# EAGLE board ODS_schematic_v41 (EAGLE 9.7.0)
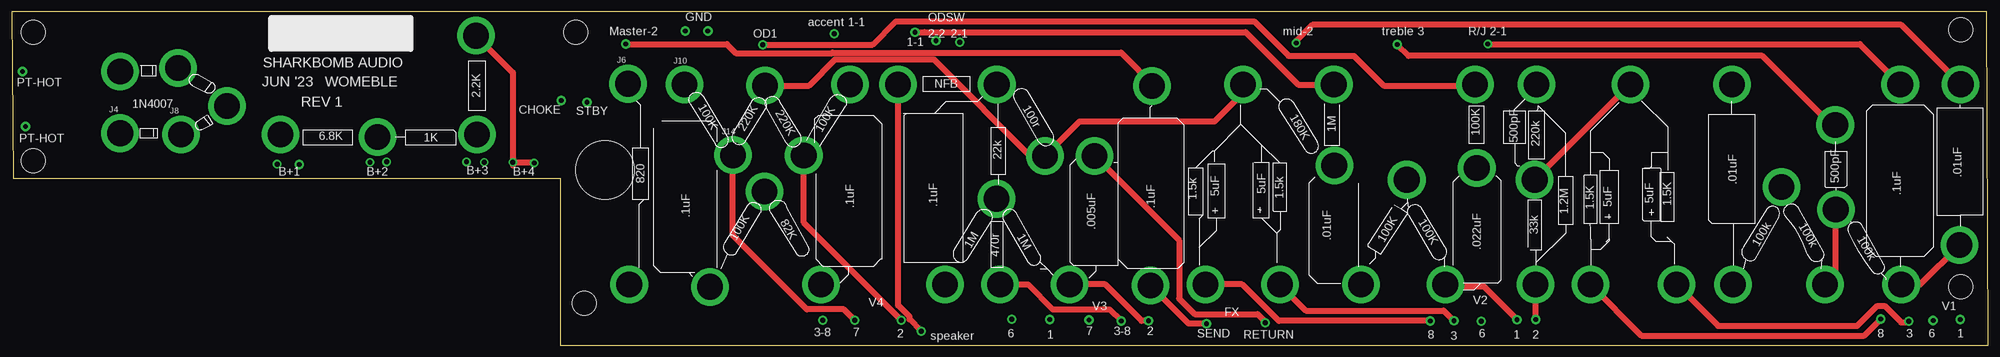
[diagram p0: board, top side]
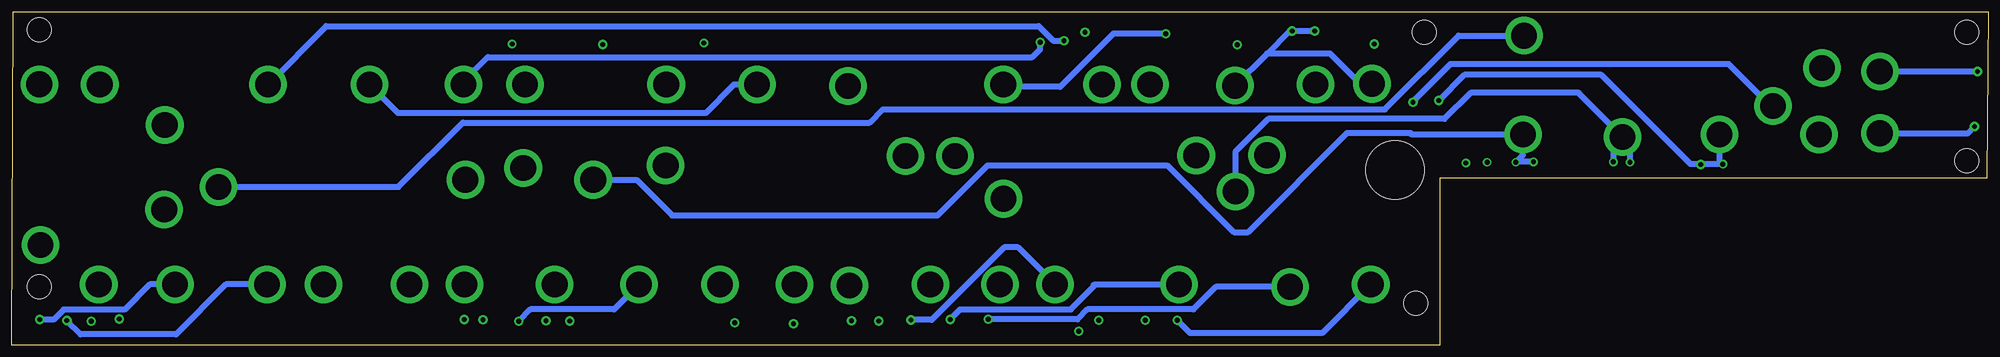
[diagram p1: board, bottom side, seen from below]

Size 415.25 x 70 mm. Coordinates in mm from the lower left corner, seen from the top.
Outline: 0,70 0.25,35 115.25,35 115.25,0 415.25,0 415,70 0,70
Copper layers (1*16): Top / Bottom
Stack-up Default Layer Stack: Top User Defined 0.035mm / Dielectric-1 User Defined 1.5mm / Bottom User Defined 0.035mm
Design rules "default": minimum track width 6mil, minimum drill 0.35mm, track to track 6mil, track to pad 6mil, pad to pad 6mil, via to via 6mil, smd to smd 6mil, copper to edge 40mil, drill to drill 6mil, minimum pad ring 10mil, minimum via ring 8mil, stop-mask expansion 4mil, vias tented up to drill 0mil, thermal gap 10mil
Holes 12.28 mm at 124.64,36.78
Holes 5.08 mm at 4.5,65.75 4.5,38.75 409.5,66.25 409.5,12.25 120.25,8.75 118.5,65.75

## Footprints (pad centres in the part's own frame; a part is rotated, then mirrored left to right if it is on the bottom)
KEYSTONE_575-4 = drill 5.4 pad 7.9: 1 0,0
UNLABELED = drill 1 pad 1.778: P$1 0,0
PAD2 = drill 1.016 pad 1.93: P$1 0,0

## Placement (x,y rotation side)
J1  575-4  [KEYSTONE_575-4]  97.74,44.23 0 top
J2  575-4  [KEYSTONE_575-4]  76.85,43.73 0 top
J3  575-4  [KEYSTONE_575-4]  56.46,44.23 0 top
J4  575-4  [KEYSTONE_575-4]  22.75,44.5 0 top
J5  575-4  [KEYSTONE_575-4]  45.18,50.23 0 top
J6  575-4  [KEYSTONE_575-4]  129.45,54.9 0 top
J7  575-4  [KEYSTONE_575-4]  34.9,58.23 0 top
J8  575-4  [KEYSTONE_575-4]  35.51,44.23 0 top
J9  575-4  [KEYSTONE_575-4]  129.73,12.73 0 top
J10  575-4  [KEYSTONE_575-4]  141.34,54.73 0 top
J11  575-4  [KEYSTONE_575-4]  146.7,12.23 0 top
J12  575-4  [KEYSTONE_575-4]  158.25,54.5 0 top
J13  575-4  [KEYSTONE_575-4]  158.17,32.23 0 top
J14  575-4  [KEYSTONE_575-4]  151.49,39.89 0 top
J15  575-4  [KEYSTONE_575-4]  166.39,39.8 0 top
J16  575-4  [KEYSTONE_575-4]  170,12.73 0 top
J17  575-4  [KEYSTONE_575-4]  176.11,54.73 0 top
J18  575-4  [KEYSTONE_575-4]  186.22,54.73 0 top
J19  575-4  [KEYSTONE_575-4]  22.75,57.5 0 top
J20  575-4  [KEYSTONE_575-4]  206.94,54.73 0 top
J21  575-4  [KEYSTONE_575-4]  196.05,12.73 0 top
J22  575-4  [KEYSTONE_575-4]  207.66,12.73 0 top
J23  575-4  [KEYSTONE_575-4]  222.27,12.73 0 top
J24  575-4  [KEYSTONE_575-4]  206.88,30.73 0 top
J25  575-4  [KEYSTONE_575-4]  227.49,39.73 0 top
J26  575-4  [KEYSTONE_575-4]  217.1,39.73 0 top
J27  575-4  [KEYSTONE_575-4]  258.71,54.73 0 top
J28  575-4  [KEYSTONE_575-4]  250.82,12.73 0 top
J29  575-4  [KEYSTONE_575-4]  266.43,12.73 0 top
J30  575-4  [KEYSTONE_575-4]  239.25,12.5 0 top
J31  575-4  [KEYSTONE_575-4]  239.56,54.42 0 top
J32  575-4  [KEYSTONE_575-4]  277.76,54.73 0 top
J33  575-4  [KEYSTONE_575-4]  277.87,37.73 0 top
J34  575-4  [KEYSTONE_575-4]  283.48,12.73 0 top
J35  575-4  [KEYSTONE_575-4]  293.09,34.73 0 top
J36  575-4  [KEYSTONE_575-4]  301.2,12.73 0 top
J37  575-4  [KEYSTONE_575-4]  307.81,37.23 0 top
J38  575-4  [KEYSTONE_575-4]  307.42,54.73 0 top
J39  575-4  [KEYSTONE_575-4]  97.5,65 0 top
J40  575-4  [KEYSTONE_575-4]  320.14,12.73 0 top
J42  575-4  [KEYSTONE_575-4]  320.36,54.73 0 top
J43  575-4  [KEYSTONE_575-4]  319.97,34.73 0 top
J44  575-4  [KEYSTONE_575-4]  340.08,54.73 0 top
J45  575-4  [KEYSTONE_575-4]  331.69,12.73 0 top
J46  575-4  [KEYSTONE_575-4]  349.8,12.73 0 top
J47  575-4  [KEYSTONE_575-4]  361.41,54.73 0 top
J49  575-4  [KEYSTONE_575-4]  361.63,12.73 0 top
J50  575-4  [KEYSTONE_575-4]  409.25,21 0 top
J51  575-4  [KEYSTONE_575-4]  371.85,33.23 0 top
J52  575-4  [KEYSTONE_575-4]  380.96,12.73 0 top
J53  575-4  [KEYSTONE_575-4]  383.25,28.5 0 top
J54  575-4  [KEYSTONE_575-4]  383.13,46.26 0 top
J55  575-4  [KEYSTONE_575-4]  396.79,54.73 0 top
J56  575-4  [KEYSTONE_575-4]  409.49,54.78 0 top
J57  575-4  [KEYSTONE_575-4]  397.01,12.73 0 top
PAD1  PAD  [UNLABELED]  310.12,63.23 0 top
PAD2  PAD  [UNLABELED]  269.87,63.44 0 top
PAD3  PAD  [UNLABELED]  75.25,38.41 0 top
PAD4  PAD  [UNLABELED]  105.25,38.41 0 top
PAD5  PAD  [UNLABELED]  95.5,38.5 0 top
PAD6  PAD  [UNLABELED]  78.75,38.5 0 top
PAD7  PAD  [UNLABELED]  55.75,38 0 top
PAD8  PAD  [UNLABELED]  99.25,38.41 0 top
PAD9  PAD  [UNLABELED]  109.75,38.25 0 top
U$1  PADS.RND_NL  [PAD2]  291.12,63.14 0 top
U$2  PADS.RND_NL  [PAD2]  409.37,5.35 0 top
U$3  PADS.RND_NL  [PAD2]  194.19,63.94 0 top
U$4  PADS.RND_NL  [PAD2]  403.69,5.15 0 top
U$5  PADS.RND_NL  [PAD2]  398.61,5 0 top
U$6  PADS.RND_NL  [PAD2]  392.69,5.46 0 top
U$7  PADS.RND_NL  [PAD2]  199.19,63.64 0 top
U$8  PADS.RND_NL  [PAD2]  320.19,5.35 0 top
U$9  PADS.RND_NL  [PAD2]  157.76,63.11 0 top
U$10  PADS.RND_NL  [PAD2]  316.26,5.32 0 top
U$11  PADS.RND_NL  [PAD2]  308.76,5.03 0 top
U$12  PADS.RND_NL  [PAD2]  189.76,65.74 0 top
U$13  PADS.RND_NL  [PAD2]  303.01,5.09 0 top
U$14  PADS.RND_NL  [PAD2]  298.01,5.05 0 top
U$15  PADS.RND_NL  [PAD2]  238.83,5.09 0 top
U$16  PADS.RND_NL  [PAD2]  233.08,5.05 0 top
U$17  PADS.RND_NL  [PAD2]  226.33,5.26 0 top
U$18  PADS.RND_NL  [PAD2]  172.81,65.43 0 top
U$19  PADS.RND_NL  [PAD2]  263.36,4.68 0 top
U$20  PADS.RND_NL  [PAD2]  191.11,2.92 0 top
U$21  PADS.RND_NL  [PAD2]  186.86,5.24 0 top
U$22  PADS.RND_NL  [PAD2]  177.11,5.2 0 top
U$23  PADS.RND_NL  [PAD2]  210.11,5.41 0 top
U$24  PADS.RND_NL  [PAD2]  218.11,5.37 0 top
U$25  PADS.RND_NL  [PAD2]  170.36,5.21 0 top
U$26  PADS.RND_NL  [PAD2]  120.86,51.01 0 top
U$27  PADS.RND_NL  [PAD2]  2.23,57.47 0 top
U$28  PADS.RND_NL  [PAD2]  2.86,45.93 0 top
U$29  PADS.RND_NL  [PAD2]  60.36,37.92 0 top
U$30  PADS.RND_NL  [PAD2]  115.44,51.38 0 top
U$31  PADS.RND_NL  [PAD2]  129,63.25 0 top
U$32  PADS.RND_NL  [PAD2]  251,4.5 0 top
U$33  PADS.RND_NL  [PAD2]  141.5,66 0 top
U$34  PADS.RND_NL  [PAD2]  146.25,66 0 top

## Library data of the parts
J1-J40 J42-J47 J49-J57 = 575-4; AVAILABILITY: In Stock; DESCRIPTION: Banana Jack- Non-Insulated .218 Length; MF: Keystone Electronics; MP: 575-4; PACKAGE: None; PRICE: None; PURCHASE-URL: https://pricing.snapeda.com/search/part/575-4/?ref=eda
PAD1-PAD9 U$1-U$34 = supply pins

## Nets
GND: J6.1 J12.1 J26.1 J27.1 J43.1 J44.1 U$33.P$1 U$34.P$1
N$1: J50.1 J57.1
N$2: J55.1 PAD1.P$1
N$3: J56.1 PAD2.P$1
N$4: J52.1 J53.1 U$2.P$1
N$5: J54.1 U$1.P$1
N$6: J49.1 U$4.P$1
N$7: J47.1 U$3.P$1
N$8: J46.1 U$5.P$1
N$9: J42.1 U$7.P$1
N$11: J45.1 U$6.P$1
N$12: J40.1 U$8.P$1
N$14: J36.1 U$10.P$1
N$15: J38.1 U$9.P$1
N$16: J33.1
N$17: J34.1 U$11.P$1
N$18: J32.1 U$12.P$1
N$19: J28.1 U$14.P$1
N$20: J24.1
N$21: J29.1 U$13.P$1
N$22: J23.1 U$15.P$1
N$23: J22.1 U$16.P$1
N$24: J21.1 U$17.P$1
N$25: J20.1 U$18.P$1
N$26: J25.1 U$19.P$1
N$27: J18.1 U$20.P$1
N$28: J11.1 U$23.P$1
N$29: J16.1 U$24.P$1
N$30: J17.1
N$31: J10.1
N$32: J15.1 U$21.P$1
N$33: J14.1 U$22.P$1
N$34: J9.1 U$25.P$1
N$37: J3.1 PAD7.P$1 U$29.P$1 U$30.P$1
N$38: J19.1 U$27.P$1
N$39: J4.1 U$28.P$1
N$40: J5.1 U$26.P$1
N$41: J30.1 U$32.P$1
N$42: J31.1 U$31.P$1
VA: J1.1 J35.1 PAD5.P$1 PAD8.P$1
VC: J2.1 J13.1 PAD3.P$1 PAD6.P$1
VR: J39.1 J51.1 PAD4.P$1 PAD9.P$1

## Tracks (layer width: path | path; a pad name or v marks a point on that pad's centre or on a via)
GND
  Top 1.27: J27.1 258.71,52.96 252.73,46.98 224.35,46.98 J26.1 216.35,38.98 214.74,38.98 193.72,60 173,60 167.5,54.5 J12.1 | J43.1 339.97,54.73 J44.1
  Bottom 1.016: 258.73,54.75 J27.1 | 129.45,54.8 J6.1
  Bottom 1.27: U$33.P$1 U$34.P$1 146.75,66 151.5,61.25 | J6.1 131.9,54.9 138.25,61.25 151.5,61.25 | 151.5,61.25 J12.1 | J27.1 263.52,54.73 269.5,48.75 334.1,48.75 J44.1
N$1
  Top 1.27: J57.1 400.98,12.73 J50.1
N$2
  Top 1.27: PAD1.P$1 388.29,63.23 J55.1
N$3
  Top 1.27: J56.1 397.02,67.25 273.25,67.25 269.87,63.87 PAD2.P$1
N$4
  Top 1.27: J52.1 383.25,15.02 J53.1
  Bottom 1.27: J52.1 386.27,12.73 391.54,7.46 404.36,7.46 406.47,5.35 U$2.P$1
N$5
  Top 1.27: J54.1 382.24,46.26 367.75,60.75 293.51,60.75 U$1.P$1
N$6
  Bottom 1.27: J49.1 370.27,12.73 380.75,2.25 400.79,2.25 U$4.P$1
N$7
  Bottom 1.27: J47.1 349.25,66.89 349.25,67 199.5,67 196.44,63.94 U$3.P$1
N$8
  Top 1.27: J46.1 358.53,4 387.75,4 392,8.25 393.5,8.25 397,4.75 398.36,4.75 U$5.P$1
N$9
  Bottom 1.27: J42.1 320.36,55.39 315.25,60.5 200.83,60.5 199.19,62.14 U$7.P$1
N$11
  Top 1.27: J45.1 342.42,2 389.23,2 U$6.P$1
N$12
  Top 1.27: U$8.P$1 320.19,12.68 J40.1
N$14
  Top 1.27: U$10.P$1 309.33,12.25 301.5,12.25 301.2,12.55 J36.1
N$15
  Top 1.27: U$9.P$1 180.86,63.11 185.75,68 261,68 268.25,60.75 282,60.75 288.25,54.5 307.19,54.5 J38.1
N$17
  Bottom 1.27: J34.1 288.71,7.5 306.29,7.5 U$11.P$1
N$18
  Top 1.27: U$12.P$1 191.74,65.74 191.75,65.75 259.25,65.75 270.27,54.73 J32.1
  Bottom 1.016: 277.74,54.75 J32.1
N$19
  Top 1.27: U$14.P$1 266.2,5.05 258.52,12.73 J28.1
N$21
  Top 1.27: J29.1 271.91,7.25 300.85,7.25 U$13.P$1
N$22
  Top 1.27: U$15.P$1 237.41,5.09 229.77,12.73 J23.1
N$23
  Top 1.27: J22.1 213.52,12.73 218.75,7.5 230.63,7.5 U$16.P$1
N$24
  Bottom 1.27: J21.1 203.82,20.5 206.75,20.5 221.99,5.26 U$17.P$1
N$25
  Bottom 1.27: U$18.P$1 183.82,65.43 195,54.25 206.46,54.25 J20.1
N$26
  Top 1.27: J25.1 245.25,21.97 245.25,9.75 248.5,6.5 261.75,6.5 263.36,4.89 U$19.P$1
N$27
  Top 1.27: U$20.P$1 188.61,5.42 188.61,5.97 186.22,8.36 J18.1
N$28
  Bottom 1.27: J11.1 162.27,12.23 167,7.5 189.25,7.5 191.34,5.41 U$23.P$1
N$29
  Bottom 1.27: U$24.P$1 215.98,7.5 201.5,7.5 192.75,7.5 188,12.25 188,12.5 187.77,12.73 J16.1
N$32
  Top 1.27: U$21.P$1 166.39,25.71 J15.1
N$33
  Top 1.27: U$22.P$1 174.81,7.5 167.03,7.5 151.49,23.04 J14.1
N$34
  Bottom 1.27: J9.1 139.96,2.5 167.65,2.5 U$25.P$1
N$37
  Bottom 1.27: J3.1 56.46,38.71 PAD7.P$1 60.28,38 | 60.28,38 62.53,38 81.28,56.75 110.07,56.75 U$30.P$1 | 60.28,38 U$29.P$1
N$38
  Bottom 1.27: J19.1 2.26,57.5 U$27.P$1
N$39
  Bottom 1.27: J4.1 4.29,44.5 U$28.P$1
N$40
  Bottom 1.27: J5.1 45.73,50.23 54.5,59 113,59 120.86,51.14 U$26.P$1
N$41
  Top 1.27: U$32.P$1 247.25,4.5 J30.1
N$42
  Top 1.27: U$31.P$1 150.25,63.25 152.14,61.36 172.35,61.36 172.41,61.42 233.08,61.42 240.5,54 239.97,54 J31.1
VA
  Bottom 1.27: J35.1 283.98,34.73 276.5,27.25 220.75,27.25 210.25,37.75 172.5,37.75 158.5,23.75 155.5,23.75 134.67,44.58 121.41,44.58 121.07,44.23 J1.1 97.74,39.91 PAD8.P$1 99.15,38.5 PAD5.P$1
VC
  Bottom 1.27: PAD6.P$1 78.75,41.83 J2.1 | PAD3.P$1 75.25,42.13 J2.1 | J2.1 86,52.88 86,53 108.75,53 114.25,47.5 151.25,47.5 158.17,40.58 J13.1
VR
  Top 1.27: PAD9.P$1 105.4,38.25 | 105.4,38.25 PAD4.P$1 | J39.1 105.25,57.25 105.25,37.75 105.4,37.91 105.4,38.25
  Bottom 1.27: J39.1 111.25,65 126.75,49.5 232.25,49.5 235,46.75 320.5,46.75 334.02,33.23 J51.1

## Text on the board
tNames: GND | Master-2 | OD1 | 2-2 | ODSW | 2-1 | mid-2 | treble 3 | R/J 2-1 | accent 1-1 | 1-1 | SHARKBOMB AUDIO | NFB | PT-HOT | JUN '23 | WOMEBLE | 2.2K | 1N4007 | REV 1 | 100K | CHOKE | 220K | STBY | 100r | 220K | 100K | 1M | 180K | 100K | PT-HOT | 6.8K | 500pF | 220k | 1K | 22k | B+3 | B+1 | B+2 | B+4 | .01uF | 820 | .1uF | .1uF | .01uF | 500pF | .1uF | 5uF | 1.5k | 5uF | 1.5k | .1uF | 5uF | .1uF | 1.5K | 5uF | 1.5K | + | 100K | 1.2M | 82K | 100k | 100k | 1M | .005uF | 1M | 33k | 100K | .01uF | 100K | .022uF | 470r | 100k | V2 | V4 | V3 | V1 | FX | 3-8 | 7 | 7 | 3-8 | 2 | 2 | speaker | 6 | 1 | SEND | RETURN | 8 | 3 | 6 | 1 | 2 | 8 | 3 | 6 | 1